# Altium PCB stm32_board.PcbDoc
Units mm, origin at the board's own origin, x right, y up, seen from the top; angles counter-clockwise.
Board outline 49 x 27 mm, 4 copper layers (Top Layer, Int1 (GND), Int2 (PWR), Bottom Layer), stack 2.365 mm thick; 44 components, 31 nets, 184 pads, 58 vias.
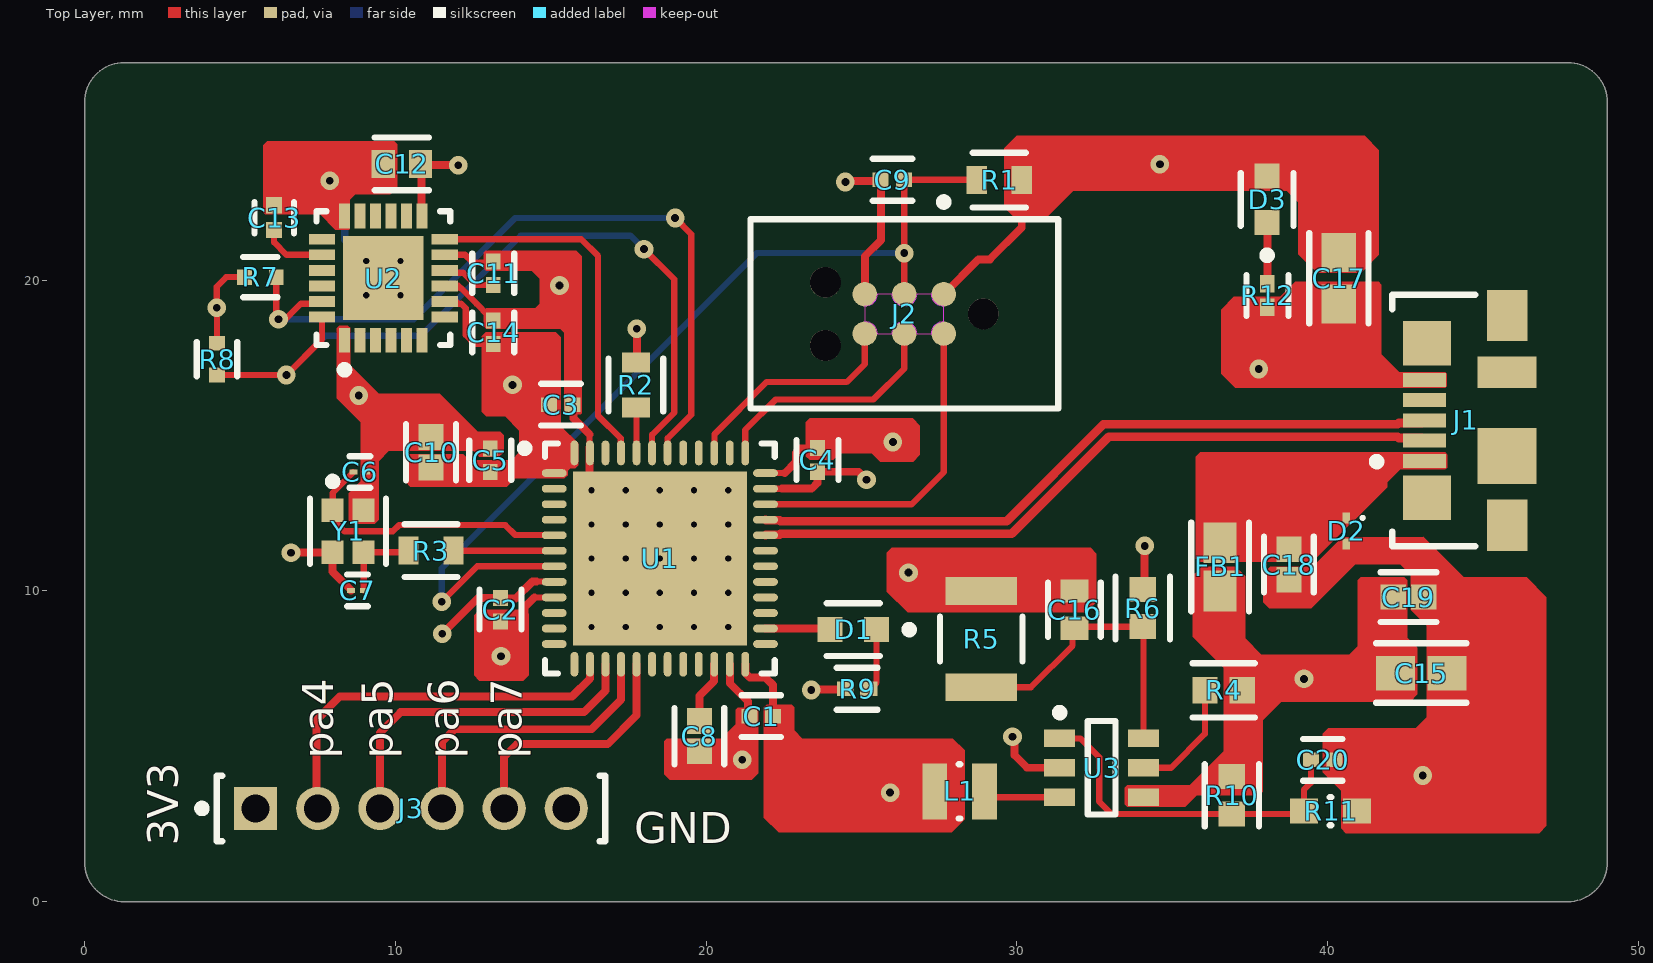
[diagram p0: Top Layer view]
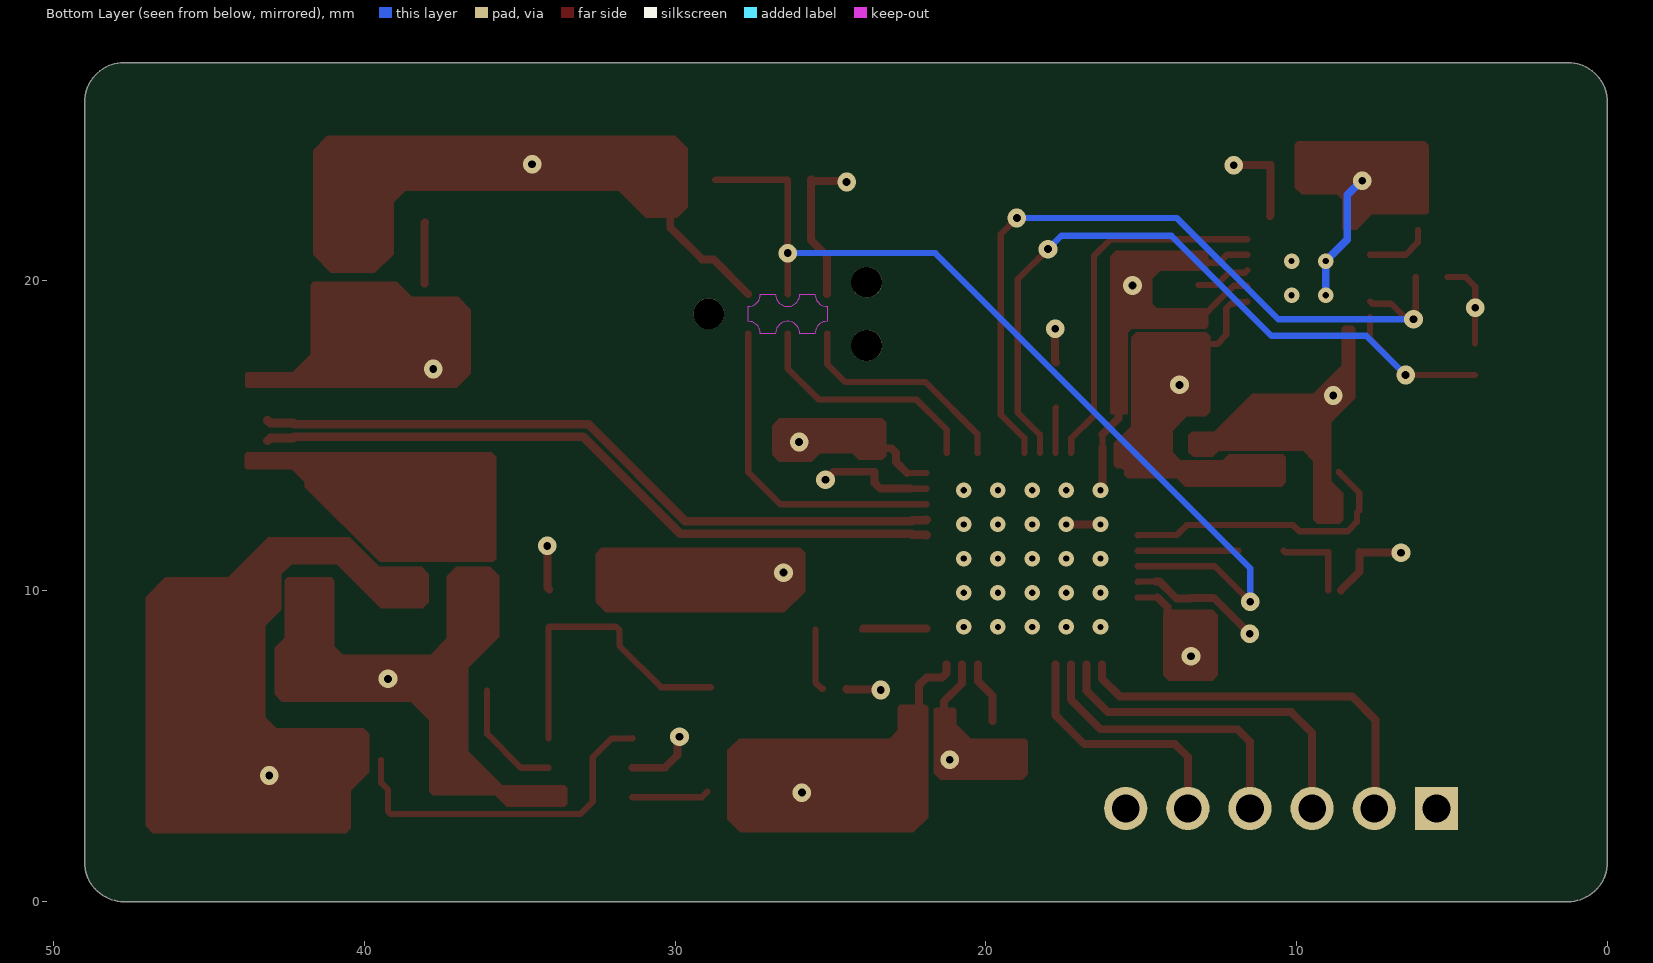
[diagram p1: Bottom Layer view, seen from below]
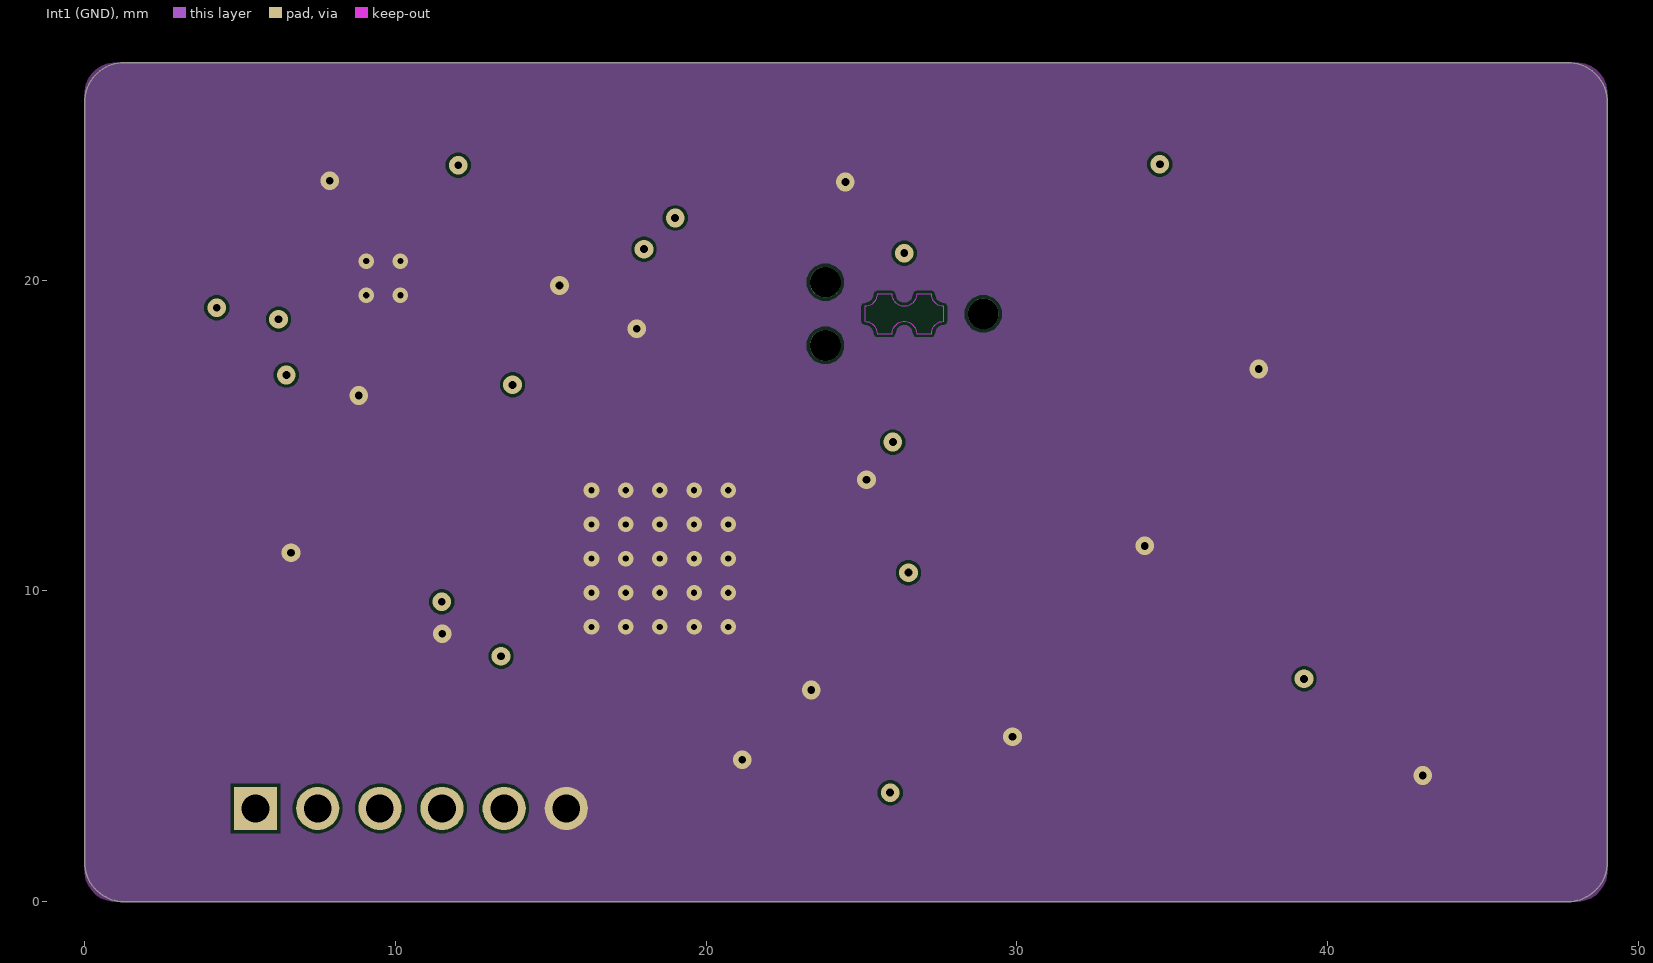
[diagram p2: Int1 (GND)]
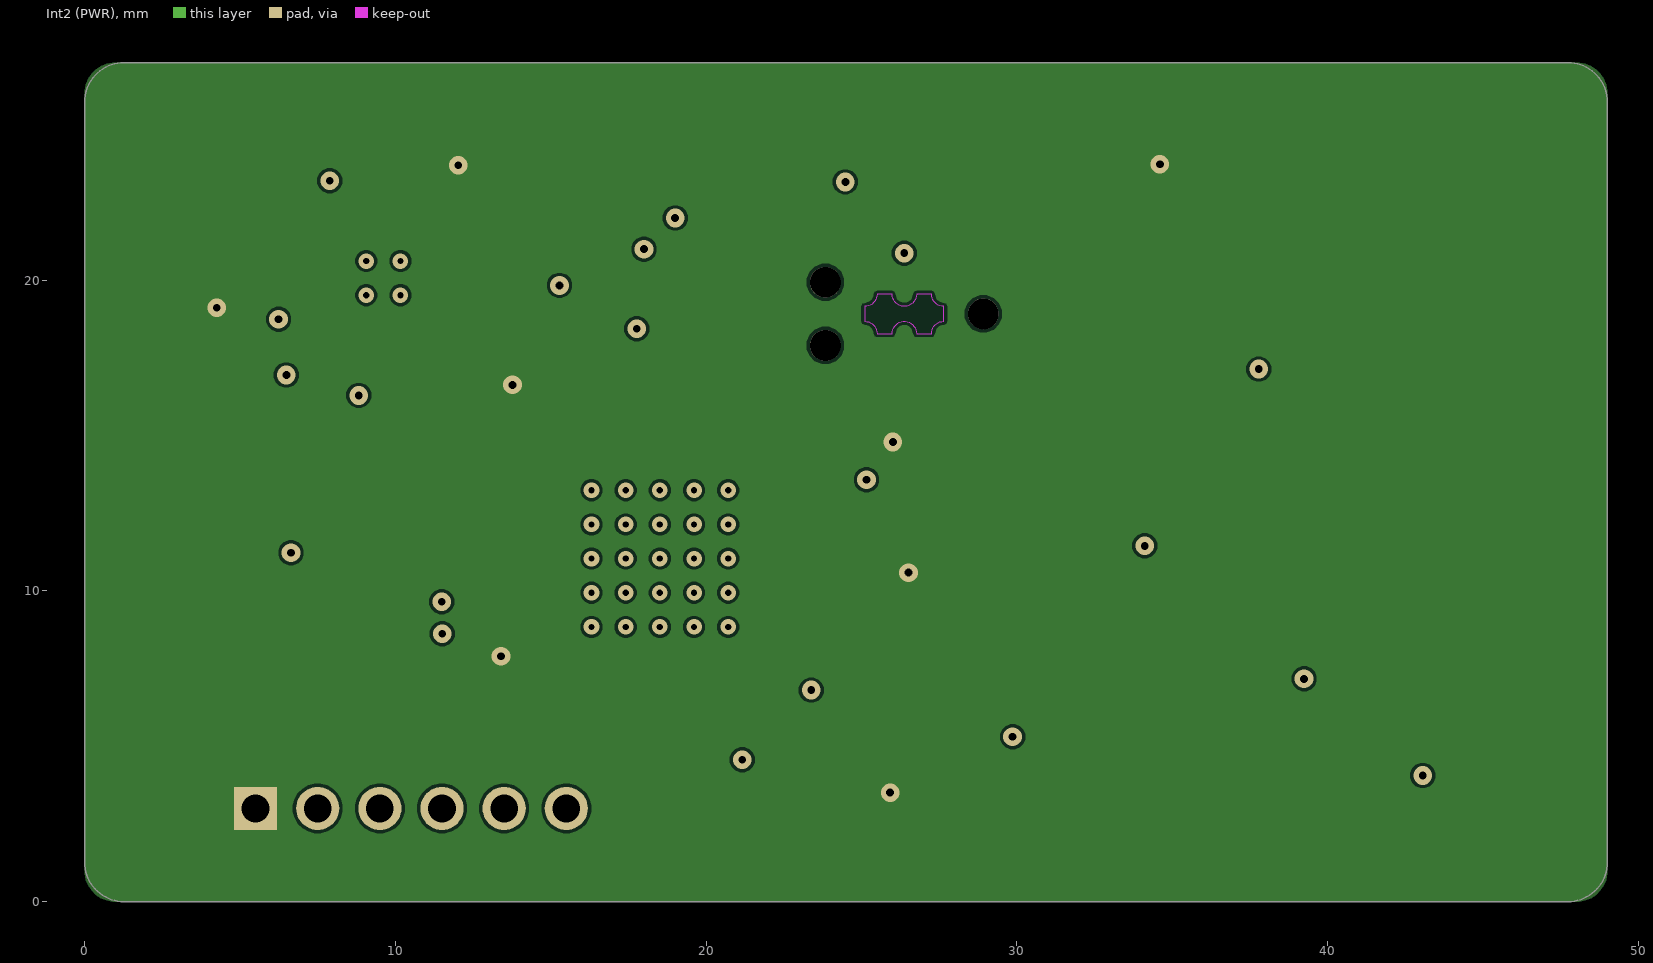
[diagram p3: Int2 (PWR)]
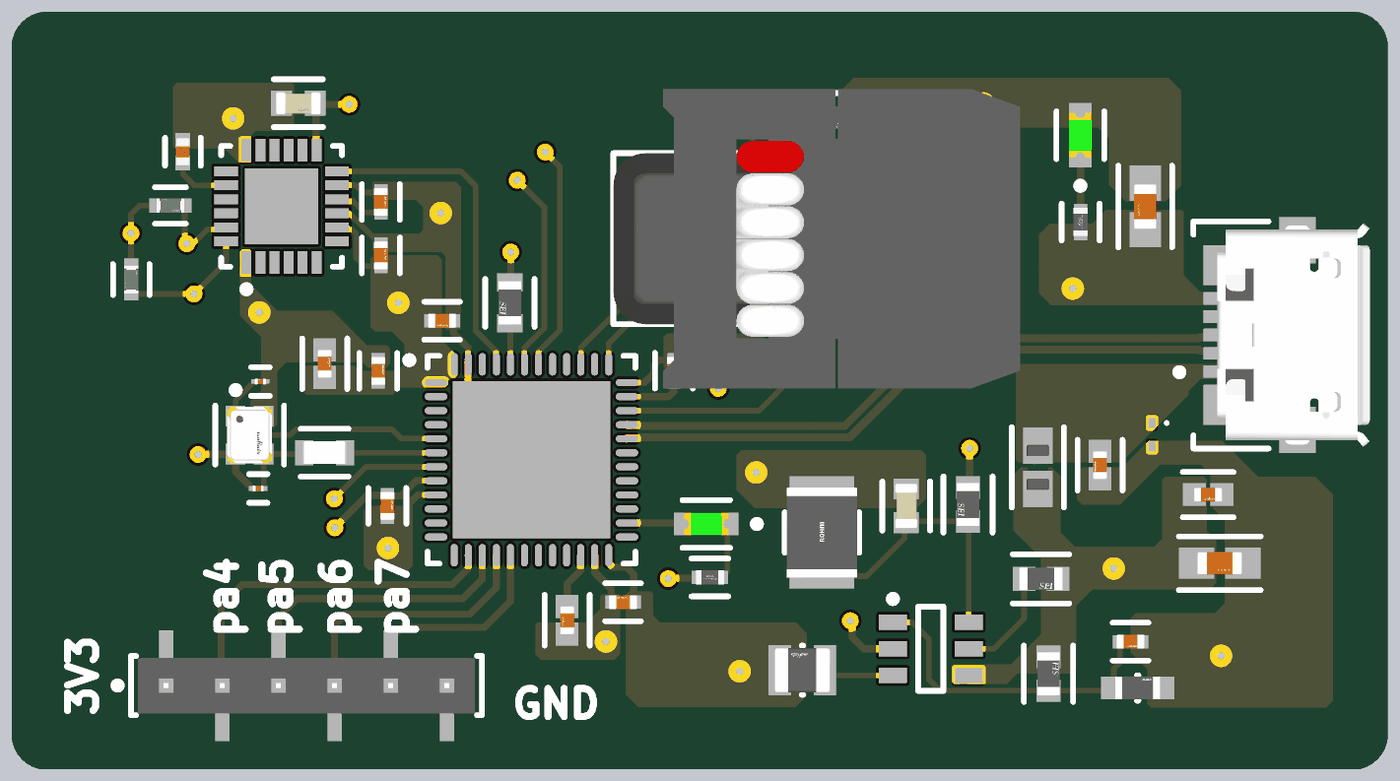
[diagram p4: 3D render of the assembled board from above, using the file's embedded part models]

## Layer stack, top to bottom
Top Solder: solder mask 0.0254, SM-001, Dk 4
Top Layer: signal copper 0.035
Dielectric 1: prepreg 0.24, PP-017, Dk 4.6
Dielectric 2: prepreg 0.24, PP-017, Dk 4.6
Int1 (GND): signal copper 0.035
Dielectric 3: core 1.265, Core-039, Dk 4.6
Int2 (PWR): signal copper 0.035
Dielectric 4: prepreg 0.24, PP-017, Dk 4.6
Dielectric 5: prepreg 0.24, PP-017, Dk 4.6
Bottom Layer: signal copper 0.035
Bottom Solder: solder mask 0.0254, SM-001, Dk 4

## Board outline
1.27,0 cw(c1.27,1.27) 0,1.27 0,25.73 cw(c1.27,25.73) 1.27,27 47.73,27 cw(c47.73,25.73) 49,25.73 49,1.27 cw(c47.73,1.27) 47.73,0

## Design rules (kind name [scope] priority, off if disabled: settings)
AcuteAngle [All] p1: minimum=6.00000000000000E+0001 checktracksonly=FALSE
Clearance [All] p1: gap=0.1 ignorepadtopadclearanceinfootprint=FALSE except(0.2: Arc-THPad Arc-Via Track-THPad Track-Via)
DiffPairsRouting [All] p1: maxlimit=0.127 minlimit=0.127 mostfreqgap=0.127 toplayer_minwidth=0.28 toplayer_maxwidth=0.28 toplayer_prefwidth=0.28 bottomlayer_minwidth=0.28 bottomlayer_maxwidth=0.28 bottomlayer_prefwidth=0.28 impedanceprofiledriven=TRUE impedanceprofileid={46C85864-5B5E-46E6-8006-2A87E43765AD} impedanceprofilevalue=90.000000 maxuncoupledlength=12.7
MinimumAnnularRing [All] p1: minimumring=0.2
ParallelSegment [All] p1: limit=254 gap=0.16
PolygonConnect [All] p1: connectstyle=Direct reliefconductorwidth=0.254 reliefentries=4 polygonreliefangle="90 Angle" airgapwidth=0.254
RoutingVias [All] p1: holewidth=0.3 width=0.7 viastyle="Through Hole" minholewidth=0.25 minwidth=0.55 maxholewidth=0.4 maxwidth=1
SolderMaskExpansion [All] p1: expansion=0.102 istentingtop=FALSE
SupplyNets "Schematic Supply Nets_3" [InNet('3.3V')] p1: voltage=0.000
SupplyNets "Schematic Supply Nets_2" [InNet('GND')] p2: voltage=0.000
SupplyNets "Schematic Supply Nets_1" [InNet('VBUS')] p3: voltage=0.000
SupplyNets "Schematic Supply Nets" [InNet('5V')] p4: voltage=0.000
UnRoutedNet [All] p1: checkbadconnections=TRUE
Width [All] p1: maxlimit=0.254 minlimit=0.16 preferedwidth=0.2
28 further rules are at their usual default settings.

## Classes and differential pairs
differential pair USB_D: +USB_D_P -USB_D_N

## Components (designator, comment, footprint, x,y, rotation, side; value= is the part's Value field where it differs from the comment)
C1 "CL05B104KP5NNNC" FP-CL17-IPC_C 21.77,5.97 r180 top
C2 "CL05B104KP5NNNC" FP-CL17-IPC_C 13.38,9.4 r90 top
C3 "CL05B104KP5NNNC" FP-CL17-IPC_C 15.327,15.994 r0 top
C4 "CL05B104KP5NNNC" FP-CL17-IPC_C 23.582,14.214 r270 top
C5 "CL05B104KP5NNNC" FP-CL17-IPC_C 13.053,14.208 r90 top
C6 "GRM0225C1C100JA03L" FP-GRM022-0_02-IPC_C 8.858,13.827 r180 top
C7 "GRM0225C1C100JA03L" FP-GRM022-0_02-IPC_C 8.78,10.02 r0 top
C8 "GRM155D71A225ME15D" FP-GRM155-0_2-0_05-IPC_A 19.78,5.326 r270 top
C9 "CL05B104KP5NNNC" FP-CL17-IPC_C 25.995,23.233 r180 top
C10 "GRM155D71A225ME15D" FP-GRM155-0_2-0_05-IPC_A 11.148,14.462 r90 top
C11 "CL05B104KP5NNNC" FP-CL17-IPC_C 13.148,20.225 r90 top
C12 "C0603C103K5RACTU" FP-C0603C-CF-MFG 10.21,23.74 r180 top value="10,000 pF"
C13 "C0402C222F4GACTU" FP-C0402-BB-MFG 6.098,22.013 r90 top value=2n2
C14 "CL05B104KP5NNNC" FP-CL17-IPC_C 13.148,18.32 r90 top
C15 "LMK107BBJ106MALT" FP-0603-L_1_6_0_2-W_0_8_0-IPC_A 43.013,7.358 r0 top
C16 "C0603C220J5GACTU" FP-C0603C-CF-MFG 31.85,9.4 r270 top value="22 pF"
C17 "LMK107BBJ106MALT" FP-0603-L_1_6_0_2-W_0_8_0-IPC_A 40.36,20.06 r270 top
C18 "GRM155D71A225ME15D" FP-GRM155-0_2-0_05-IPC_A 38.75,10.85 r270 top
C19 "GRM155D71A225ME15D" FP-GRM155-0_2-0_05-IPC_A 42.6,9.8 r0 top
C20 "CL05B104KP5NNNC" FP-CL17-IPC_C 39.838,4.564 r0 top
D1 "LTST-C190GKT" FP-LTST-C190GKT-MFG 24.733,8.755 r180 top
D2 "ESD9X5.0ST5G" ONSC-SOD-923-2-514AA-01_V 40.6,11.93 r270 top
D3 "LTST-C190GKT" FP-LTST-C190GKT-MFG 38.05,22.6 r90 top
FB1 "BLM18KG121TN1D" FP-BLM18-0_15-t0_6-d1_2-IPC_A 36.536,10.773 r270 top
J1 "473460001" FP-473460001-MFG 45.426,15.486 r90 top
J2 "TC2030-CTX-NL" FP-TC2030-CTX-NL-MFG 26.376,18.915 r180 top
J3 "TMM-106-01-T-S" FP-TMM-106-01-T-S-MFG 10.5,3 r0 top
L1 "LQM2MPN2R2NG0L" FP-LQM2MPN_G0-MFG 28.154,3.548 r180 top
R1 "RMCF0603FT10K0" FP-RMCF0603-MFG 29.43,23.22 r0 top
R2 "RMCF0603FT10K0" FP-RMCF0603-MFG 17.74,16.629 r270 top
R3 "RMCF0603ZT0R00" FP-RMCF0603-MFG 11.144,11.295 r0 top value=0mΩ
R4 "RMCF0603FT100K" FP-RMCF0603-IPC_C 36.65,6.8 r0 top
R5 "KTR25JZPF4303" FP-KTR25-MFG 28.85,8.45 r90 top
R6 "RMCF0603FT100K" FP-RMCF0603-IPC_C 34.05,9.45 r270 top
R7 "ERA-2AEB222X" FP-ERA2A-MFG 5.655,20.098 r180 top value=2.2kΩ
R8 "ERA-2AEB222X" FP-ERA2A-MFG 4.26,17.46 r90 top value=2.2kΩ
R9 "CRGCQ0402J220R" FP-CRGCQ0402-IPC_C 24.86,6.85 r0 top value=220Ω
R10 "RMCF0603FT100K" FP-RMCF0603-IPC_C 36.917,3.421 r90 top
R11 "RC0603FR-0747KL" FP-RC0603FR-0747KL-MFG 40.092,2.913 r0 top
R12 "CRGCQ0402J220R" FP-CRGCQ0402-IPC_C 38.06,19.508 r90 top value=220Ω
U1 "STM32F411CEU6" STM-UFQFPN48_L 18.51,11.041 r0 top
U2 "MPU-6050" IS-QFN-24_V 9.612,20.066 r90 top
U3 "AP3401" AP3401 32.726,4.31 r0 top
Y1 "XRCGB24M000F3M00R0" FP-XRCGB_F_N-MFG 8.477,11.922 r270 top

## Footprints (in the part's own frame and the unit in brackets; to place one, negate y for a bottom-side part, rotate by r counter-clockwise, add the part's x,y. Pads: shape width x height; smd on the part's side, far side on the other; paste and mask are expansions set on the pad)
AP3401 [mm] "1.5MHZ, 1A STEP-DOWN DC - DC BUCK CONVERTER"
  rect 1x0.55 smd: EN(-1.35,0.95) FB(1.35,0.95) GND(-1.35,0) LX(-1.35,-0.95) PG(1.35,0) VIN(1.35,-0.95)
  silkscreen extent -1.47,-1.5 0.45,1.9, body extent -0.85,-1.5 0.85,1.5, height 1.1
FP-0603-L_1_6_0_2-W_0_8_0-IPC_A [mm]
  rect 1.258x1.112 smd paste+0 mask+0: 1(-0.827,0) 2(0.827,0)
  silkscreen extent -1.46,-0.96 1.46,0.96, body extent -1.96,-1.06 1.96,1.06, height 0.25
FP-473460001-MFG [mm]
  rect 0.45x1.38 smd paste+0 mask+0: 1(-1.3,2.31) 2(-0.65,2.31) 3(0,2.31) 4(0.65,2.31) 5(1.3,2.31)
  rect 1.425x1.55 smd paste+0 mask+0: 6(-2.488,2.225) 7(2.488,2.225)
  rect 1.65x1.3 smd paste+0 mask+0: 8(-3.375,-0.35) 11(3.375,-0.35)
  rect 1.8x1.9 smd paste+0 mask+0: 9(-1.15,-0.35)
  rect 1x1.9 smd paste+0 mask+0: 10(1.55,-0.35)
  silkscreen extent -4.05,0.67 4.05,3.97, body extent -4.3,-2.48 4.3,3.45, height 0.25
FP-BLM18-0_15-t0_6-d1_2-IPC_A [mm]
  rect 1.306x1.058 smd paste+0 mask+0: 1(-0.776,0) 2(0.776,0)
  silkscreen extent -1.43,-0.93 1.43,0.93, body extent -1.93,-1.03 1.93,1.03, height 0.25
FP-C0402-BB-MFG [mm]
  rect 0.52x0.52 smd paste+0 mask+0: 1(-0.4,0) 2(0.4,0)
  silkscreen extent -0.5,-0.64 0.5,0.64, body extent -0.8,-0.4 0.8,0.4, height 0.25
FP-C0603C-CF-MFG [mm]
  rect 0.75x0.9 smd paste+0 mask+0: 1(-0.6,0) 2(0.6,0)
  silkscreen extent -0.87,-0.85 0.88,0.85, body extent -1.2,-0.6 1.2,0.6, height 0.25
FP-CL17-IPC_C [mm]
  rect 0.515x0.472 smd paste+0 mask+0: 1(-0.379,0) 2(0.379,0)
  silkscreen extent -0.64,-0.67 0.64,0.67, body extent -0.74,-0.38 0.74,0.38, height 0.25
FP-CRGCQ0402-IPC_C [mm]
  rect 0.56x0.472 smd paste+0 mask+0: 1(-0.376,0) 2(0.376,0)
  silkscreen extent -0.66,-0.67 0.66,0.67, body extent -0.76,-0.38 0.76,0.38, height 0.25
FP-ERA2A-MFG [mm]
  rect 0.475x0.5 smd paste+0 mask+0: 1(-0.512,0) 2(0.512,0)
  silkscreen extent -0.55,-0.65 0.55,0.65, body extent -0.85,-0.4 0.85,0.4, height 0.25
FP-GRM022-0_02-IPC_C [mm]
  rect 0.256x0.161 smd paste+0 mask+0: 1(-0.203,0) 2(0.203,0)
  silkscreen extent -0.33,-0.51 0.33,0.51, body extent -0.43,-0.21 0.43,0.21, height 0.25
FP-GRM155-0_2-0_05-IPC_A [mm]
  rect 0.828x0.806 smd paste+0 mask+0: 1(-0.489,0) 2(0.489,0)
  silkscreen extent -0.9,-0.8 0.9,0.8, body extent -1.1,-0.6 1.1,0.6, height 0.25
FP-KTR25-MFG [mm]
  rect 0.9x2.3 smd paste+0 mask+0: 1(-1.55,0) 2(1.55,0)
  silkscreen extent -0.72,-1.33 0.72,1.33, body extent -2.1,-1.43 2.1,1.43, height 0.25
FP-LQM2MPN_G0-MFG [mm]
  rect 0.8x1.8 smd paste+0 mask+0: 1(-0.8,0) 2(0.8,0)
  silkscreen extent -0.03,-0.87 0.03,0.87, body extent -1.3,-1 1.3,1, height 0.25
FP-LTST-C190GKT-MFG [mm]
  rect 0.8x0.8 smd paste+0 mask+0: 1(-0.75,0) 2(0.75,0)
  silkscreen extent -1.92,-0.85 0.85,0.85, body extent -1.25,-0.55 1.25,0.55, height 0.25
FP-RC0603FR-0747KL-MFG [mm]
  rect 0.9x0.8 smd paste+0 mask+0: 1(-0.85,0) 2(0.85,0)
  silkscreen extent -0.03,-0.45 0.03,0.45, body extent -1.4,-0.55 1.4,0.55, height 0.25
FP-RMCF0603-IPC_C [mm]
  rect 0.806x0.858 smd paste+0 mask+0: 1(-0.601,0) 2(0.601,0)
  silkscreen extent -1,-0.87 1,0.87, body extent -1.1,-0.58 1.1,0.58, height 0.25
FP-RMCF0603-MFG [mm]
  rect 0.65x0.9 smd paste+0 mask+0: 1(-0.725,0) 2(0.725,0)
  silkscreen extent -0.85,-0.88 0.85,0.88, body extent -1.15,-0.58 1.15,0.58, height 0.25
FP-TC2030-CTX-NL-MFG [mil]
  round 30.98 smd paste-39370.1 mask+0: 1(-50,-25) 2(-50,25) 3(0,-25) 4(0,25) 5(50,-25) 6(50,25)
  round 39.02 hole 39.02 unplated paste-99999 mask+0: ""(-100,0) ""(100,-40) ""(100,40)
  Keep-Out Layer region: -34.51,-25 -15.49,-25 -13.96,-18.28 -9.66,-12.89 -3.45,-9.9 3.45,-9.9 9.66,-12.89 13.96,-18.28 15.49,-25 15.49,-25 34.51,-25 35.69,-19.07 39.05,-14.05 44.07,-10.69 50,-9.51 50,-9.51 50,9.51 44.07,10.69 39.05,14.05 35.69,19.07 34.51,25 34.51,25 15.49,25 13.96,18.28 9.66,12.89 3.45,9.9 -3.45,9.9 -9.66,12.89 -13.96,18.28 -15.49,25 -15.49,25 -34.51,25 -35.69,19.07 -39.05,14.05 -44.07,10.69 -50,9.51 -50,9.51 -50,-9.51 -44.07,-10.69 -39.05,-14.05 -35.69,-19.07 -34.51,-25
  silkscreen extent -195,-147 195,120, body extent -199,-124 199,124, height 10
FP-TMM-106-01-T-S-MFG [mm]
  rect 1.39x1.39 hole 0.89 paste-2539.97 mask+0: 1(-5,0)
  round 1.39 hole 0.89 paste-2539.97 mask+0: 2(-3,0) 3(-1,0) 4(1,0) 5(3,0) 6(5,0)
  silkscreen extent -6.85,-1.05 6.25,1.05, body extent -6.1,-2.07 6.1,2.07, height 0.25
FP-XRCGB_F_N-MFG [mm]
  rect 0.75x0.7 smd paste+0 mask+0: 1(-0.675,-0.5) 2(0.675,-0.5) 3(0.675,0.5) 4(-0.675,0.5)
  silkscreen extent -1.72,-1.22 1.05,1.22, body extent -1.15,-0.95 1.15,0.95, height 0.25
IS-QFN-24_V [mm] "QFN, 24-Leads, Body 4x4mm, Pitch 0.5mm, Thermal Pad 2.7x2.6mm"
  rect 0.8x0.35 smd: 1(-2,1.25) 2(-2,0.75) 3(-2,0.25) 4(-2,-0.25) 5(-2,-0.75) 6(-2,-1.25) 13(2,-1.25) 14(2,-0.75) 15(2,-0.25) 16(2,0.25) 17(2,0.75) 18(2,1.25)
  rect 0.35x0.85 smd mask+0.102: 7(-1.25,-1.975) 8(-0.75,-1.975) 9(-0.25,-1.975) 10(0.25,-1.975) 11(0.75,-1.975) 12(1.25,-1.975) 19(1.25,1.975) 20(0.75,1.975) 21(0.25,1.975) 22(-0.25,1.975) 23(-0.75,1.975) 24(-1.25,1.975)
  rect 2.7x2.6 smd: 25(0,0)
  silkscreen extent -3.07,-2.15 2.15,2.15, body extent -2,-2 2,2, height 0.95
ONSC-SOD-923-2-514AA-01_V [mm] "SOD, 2-Leads, Body 0.8x0.6mm"
  rect 0.36x0.25 smd: 1(-0.42,0) 2(0.42,0)
  silkscreen extent -0.47,0.48 -0.37,0.58, body extent -0.4,-0.3 0.4,0.3, height 0.43
STM-UFQFPN48_L [mm] "QFN, 48-Leads, Body 7.1x7.1mm, Pitch 0.5mm, Thermal Pad 5.6x5.6mm, IPC High Density"
  oval 0.8x0.25 smd: 1(-3.4,2.75) 2(-3.4,2.25) 3(-3.4,1.75) 4(-3.4,1.25) 5(-3.4,0.75) 6(-3.4,0.25) 7(-3.4,-0.25) 8(-3.4,-0.75) 9(-3.4,-1.25) 10(-3.4,-1.75) 11(-3.4,-2.25) 12(-3.4,-2.75) 25(3.4,-2.75) 26(3.4,-2.25) 27(3.4,-1.75) 28(3.4,-1.25) 29(3.4,-0.75) 30(3.4,-0.25) 31(3.4,0.25) 32(3.4,0.75) 33(3.4,1.25) 34(3.4,1.75) 35(3.4,2.25) 36(3.4,2.75)
  oval 0.25x0.8 smd: 13(-2.75,-3.4) 14(-2.25,-3.4) 15(-1.75,-3.4) 16(-1.25,-3.4) 17(-0.75,-3.4) 18(-0.25,-3.4) 19(0.25,-3.4) 20(0.75,-3.4) 21(1.25,-3.4) 22(1.75,-3.4) 23(2.25,-3.4) 24(2.75,-3.4) 37(2.75,3.4) 38(2.25,3.4) 39(1.75,3.4) 40(1.25,3.4) 41(0.75,3.4) 42(0.25,3.4) 43(-0.25,3.4) 44(-0.75,3.4) 45(-1.25,3.4) 46(-1.75,3.4) 47(-2.25,3.4) 48(-2.75,3.4)
  rect 5.6x5.6 smd: 49(0,0)
  silkscreen extent -4.47,-3.7 3.7,3.7, body extent -3.55,-3.55 3.55,3.55, height 0.6

## Part data
C1 C2 C3 C4 C5 C9 C11 C14 C20: library part CMP-13271-001069-1, "Cap Ceramic 100nF 10V X7R ±10% SMD 0402 +125°C Paper T/R", Capacitance=100nF, Case Code (Imperial)=0402, Case Code (Metric)=1005, Dielectric=X7R, Max Operating Temperature=125°C, Min Operating Temperature=-55°C, Package Quantity=1, Tolerance=10%, Voltage Rating=10V, Case/Package=0402, Contact Plating=Tin, Depth=0.5mm, Height=0.5mm, Length=1mm, Mount="Surface Mount", Packaging="Tape and Reel", Radiation Hardening=No, Thickness=0.022inch, Width=0.02inch
C6 C7: library part CMP-06035-032745-1, "Chip Multilayer Ceramic Capacitors for General Purpose, 01005, 10pF, C0G, 30ppm/°C, 5%, 16V", Capacitance=10pF, Case Code (Imperial)=1005, Case Code (Metric)=0402, Dielectric=C0G, Max Operating Temperature=125°C, Min Operating Temperature=-55°C, Tolerance=5%, Voltage Rating=16V, Length=0.016inch, Mount="Surface Mount", Packaging="Cut Tape", Thickness=0.009inch, Voltage Rating (DC)=16V, Width=0.008inch
C8 C10 C18 C19: library part CMP-06035-053899-1, "Chip Multilayer Ceramic Capacitors for General Purpose, 0402, 2.2uF, X7T, +22%/-33%, 20%, 10V", Capacitance=2.2uF, Case Code (Imperial)=0402, Case Code (Metric)=1005, Dielectric=X7T, Max Operating Temperature=125°C, Min Operating Temperature=-55°C, Package Quantity=10000, Tolerance=20%, Voltage Rating=10V, Case/Package=0402, Height=0.5mm, Length=0.039inch, Mount="Surface Mount", Packaging="Tape and Reel", Termination=SMD/SMT, Thickness=0.022inch, Voltage Rating (DC)=10V, Weight=0.000212oz, Width=0.02inch
C12: library part CMP-2006-03046-3, "CAP CER 10000PF 50V X7R 0603", Capacitance="10 nF", Manufacturer=KEMET, Package=C0603C-CF, Temperature="-55°C to +125°C", Temperature Characteristic=X7R, Temperature Coefficient=30ppm/°C, Temperature Range High=+125°C, Temperature Range Low=-55°C, Tolerance=0.1, Voltage Rating="50 V", Automotive=Yes, Automotive Grade="Grade 1", Category=Cap, ComponentLink2Description=Datasheet, ComponentLink2URL=https://api.kemet.com/component-edge/download/datasheet/C0603C100J5GACAUTO.pdf, Device Class L1="Passive Components", Device Class L2=Capacitors, Device Class L3="Ceramic Capacitors", Digikey Description="CAP CER 10000PF 50V X7R 0603", Height=0.87mm, Lead Free=Yes, Manufacturer Part Number=C0603C103K5RACTU, Material=Ceramic, Mouser Description="Ceramic Capacitor 0.01Uf, 50V, X7R, 10%, 0603, Full Reel", Octopart=https://octopart.com/c0603c103k5ractu-kemet-133094, RoHS=TRUE
C13: library part CMP-1034-01730-4, "CAP CER 2200PF 16V NP0 0402", Capacitance="2,200 pF", Manufacturer=Kemet, Package=C0402-BB, Temperature="-55°C to +125°C", Temperature Characteristic=C0G, Temperature Coefficient=15%, Temperature Range High=+125°C, Temperature Range Low=-55°C, Tolerance=0.01, Voltage Rating="16 V", Automotive=No, Category=Cap, ComponentLink2Description=Datasheet, ComponentLink2URL=https://content.kemet.com/datasheets/KEM_C1002_X7R_SMD.pdf, Device Class L1="Passive Components", Device Class L2=Capacitors, Device Class L3="Ceramic Capacitors", Digikey Description="CAP CER 2200PF 16V NP0 0402", Height=0.55mm, Ipc Land Pattern Name=CAPC10050X50, Lead Free=Yes, Manufacturer Part Number=C0402C222F4GACTU, Material=Ceramic, Mouser Description="Cap Ceramic 0.0022uF 16V C0G 1% SMD 0402 125°C Punched Paper T/R", Octopart=https://octopart.com/c0402c222f4gactu-kemet-12823119, RoHS=TRUE
C15 C17: library part CMP-14477-000150-3, "Multilayer Ceramic Capacitor 10uF 10V X5R 20% SMD 0603 T/R", Capacitance=10uF, Case Code (Imperial)=0603, Case Code (Metric)=1608, Dielectric=X5R, Max Operating Temperature=85°C, Min Operating Temperature=-55°C, Package Quantity=1, Resistor Type=Ceramic, Tolerance=20%, Voltage=10V, Case/Package=0603, Construction=Flat, Depth=0.8mm, Height=0.8mm, Lead Free="Lead Free", Length=1.6mm, Mount="Surface Mount", Packaging="Tape and Reel", Radiation Hardening=No, RoHS Compliant=Yes, Series=M, Termination=SMD/SMT, Thickness=0.035inch, Voltage Rating=10V, Voltage Rating (DC)=10V, Width=0.8mm
C16: library part CMP-2006-03119-3, "Cap Ceramic 22pF 50V C0G 5% SMD 0603 125°C Paper T/R", Capacitance="22 pF", Manufacturer=KEMET, Package=C0603C-CF, Temperature="-55°C to +125°C", Temperature Characteristic=C0G, Temperature Coefficient=30ppm/°C, Temperature Range High=+125°C, Temperature Range Low=-55°C, Tolerance=0.05, Voltage Rating="50 V", Automotive=Yes, Automotive Grade="Grade 1", Category=Cap, ComponentLink2Description=Datasheet, ComponentLink2URL=https://api.kemet.com/component-edge/download/datasheet/C0603C100J5GACAUTO.pdf, Device Class L1="Passive Components", Device Class L2=Capacitors, Device Class L3="Ceramic Capacitors", Digikey Description="Cap Ceramic 22pF 50V C0G 5% SMD 0603 125°C Paper T/R", Height=0.87mm, Lead Free=Yes, Manufacturer Part Number=C0603C220J5GACTU, Material=Ceramic, Mouser Description="Cap Ceramic 22pF 50V C0G 5% SMD 0603 125°C Paper T/R", Octopart=https://octopart.com/c0603c220j5gactu-kemet-98525, RoHS=TRUE
D1 D3: library part CMP-22017-000005-2, "LED GREEN CLEAR CHIP SMD", Case Code (Imperial)=0603, Case Code (Metric)=1608, Color=Green, Forward Current=30mA, Forward Voltage=2.1V, Lens Color=Colorless, Max Operating Temperature=85°C, Min Operating Temperature=-55°C, Package Quantity=1, Power Dissipation=100mW, Reverse Voltage=5V, Test Current=10mA, Voltage=2V, Case/Package=0603, Depth=0.8mm, Dominant Wavelength=569nm, Height=0.8mm, Illumination Color=Green, Lead Free="Lead Free", Length=1.6mm, Lens Style=Clear, Lens Transparency=Clear, Luminous Intensity=6mcd, Mount="Surface Mount", Number of Elements=1, Number of LEDs=1, Number of Pins=2, Packaging="Tape and Reel", Power Rating=100mW, Radiation Hardening=No, Viewing Angle=130°, Wavelength=565nm, Width=0.8mm
D2: library part CMP-1063-00108-1, "Transient Voltage Suppressor, Micro-Packaged Diode for ESD Protection, 2-Pin SOD-923, Pb-Free, Tape and Reel", Manufacturer="On Semiconductor", ComponentLink1Description="Manufacturer URL", ComponentLink1URL=http://www.onsemi.com/, ComponentLink2Description=Datasheet, ComponentLink2URL=http://www.onsemi.cn/pub_link/Collateral/ESD9X3.3ST5G-D.PDF, ComponentLink3Description="Package Specification", ComponentLink3URL=http://www.onsemi.com/pub_link/Collateral/514AA.PDF, DatasheetVersion="Rev. 7", Direction=Unidirectional, IR Max (uA)=1, Mounting Technology="Surface Mount", Number of Lines=1, PackageDescription="2-Pin SOD, Body 0.8 x 0.6 mm", PackageReference=SOD-923-2-514AA-01, PackageVersion="Rev. E, 03/2011", Packing="Tape and Reel", PartNumber=ESD9X5.0ST5G, RoHS=Pb-Free, V(BR) Min (V)=6.2, VRWM Max (V)=5
FB1: library part CMP-0686-00554-8, "FERRITE BEAD 120 OHM 0603 1LN", Case Code (Imperial)=0603, Case Code (Metric)=1608, Current Rating=3A, DC Resistance (DCR)=30mR, Inductor Type="FERRITE BEAD", Max Operating Temperature=125°C, Min Operating Temperature=-55°C, Package Quantity=4000, Test Frequency=100MHz, Tolerance=25%, Case/Package=0603, Core Material=Ferrite, Depth=0.95mm, Height=0.8mm, Impedance=120R, Lead Free="Lead Free", Length=1.6mm, Material=Ferrite, Max Current Rating=3A, Max DC Current=3A, Number of Circuits=1, Number of Lines=1, Number of Pins=2, Packaging="Tape and Reel", REACH SVHC="No SVHC", RoHS Compliant=Yes, Series=BLM18K, Termination=SMD/SMT, Width=0.8mm
J1: library part CMP-2000-05246-2, "CONN RCPT USB2.0 MICRO B SMD R/A", Current Rating=1.8A, Manufacturer=Molex, Package=0, Temperature="-30°C to +85°C", Temperature Range High=+85°C, Temperature Range Low=-30°C, Voltage Rating=30V, Automotive=No, Category=Conn, ComponentLink2Description=Datasheet, ComponentLink2URL=https://www.molex.com/webdocs/datasheets/pdf/en-us/0473460001_IO_CONNECTORS.pdf, Conn Orientation="Right Angle", Contact Material=Gold,Nickel, Device Class L1=Connectors, Device Class L2="USB Connectors", Device Class L3=unset, Digikey Description="CONN RCPT USB2.0 MICRO B SMD R/A", Footprint Url=https://www.molex.com/pdm_docs/sd/473460001_sd.pdf, Height=2.945mm, Is Female=yes, Lead Free=Yes, Manufacturer Part Number=473460001, Number Of Contacts=5, Octopart=https://octopart.com/47346-0001-molex-7164928, Pitch=0.65mm, RoHS=TRUE, Shielding=true, Usb Standard="USB 2.0"
J2: library part CMP-205963-000001-1, "6-Pin “No legs” TC2030 Plug-of-Nails™ Cable for use with ARM Cortex processors"
J3: library part CMP-02766-001694-1, "CONN HEADER VERT 6POS 2MM", Color=Black, Max Operating Temperature=105°C, Max Voltage Rating (AC)=500V, Min Operating Temperature=-55°C, Connector Type="Male Pin", Contact Material=Bronze, Contact Mating Length=0.126inch, Contact Plating=Tin, Contact Type="Male Pin", Depth=1.97mm, Gender=Male, Housing Color=Black, Housing Material=Polymer, Lead Free="Lead Free", Length=12mm, Mount="Through Hole", Number Of Contacts=6, Number of Positions=6, Number of Rows=1, Orientation=Straight, Packaging=Bulk, Pitch=2mm, Radiation Hardening=No, REACH SVHC="No SVHC", RoHS Compliant=Yes, Series="FleXYZ™ TMM", Termination=Solder, Width=1.97mm
L1: library part CMP-06042-016770-1, "Multilayer Type Inductor for Power Lines, 0806 (2016), 2.2μH, 30%, 0.138Ω, 1.2A", Case Code (Imperial)=0806, Case Code (Metric)=2016, Current Rating=1.2A, DC Resistance (DCR)=138mR, Inductance=2.2uH, Inductance Tolerance=30%, Max Operating Temperature=125°C, Min Operating Temperature=-55°C, Package Quantity=1, Self Resonant Frequency=40MHz, Test Frequency=1MHz, Case/Package=0806, Core Material=Ferrite, DC Current=1.2A, Depth=1.75mm, Height=1mm, Height - Seated (Max)=0.039inch, Lead Free="Lead Free", Length=0.079inch, Max DC Current=1.2A, Military Standard=Not, Mount="Surface Mount", Packaging="Tape and Reel", Radiation Hardening=No, REACH SVHC="No SVHC", RoHS Compliant=Yes, Series=LQM2MPN_G0, Shielding=Shielded, Termination=SMD/SMT, Tolerance=30%, Width=0.063inch
R1 R2: library part CMP-2000-06990-2, "10kΩ ±1% 0.1W 0603 Thick Film Chip Resistor AEC-Q200 compliant", Case Code (Imperial)=0603, Case Code (Metric)=1608, Max Operating Temperature=155°C, Max Power Dissipation=100mW, Min Operating Temperature=-55°C, Resistance=10kR, Resistor Type="Thick Film", Temperature Coefficient=100ppm/°C, Tolerance=1%, Case/Package=0603, Construction=Rectangular, Contact Plating=Tin, Depth=0.8mm, Features="Automotive AEC-Q200", Height=0.022inch, Lead Free="Lead Free", Length=1.55mm, Military Standard=Not, Mount="Surface Mount", Number of Terminations=2, Packaging="Tape and Reel", Power Rating=100mW, Radiation Hardening=No, RoHS Compliant=Yes, Series=RMCF, Size Code=0603, Width=0.031inch
R3: library part CMP-26527-000011-1, "RES 0 OHM JUMPER 1/10W 0603", Manufacturer=Stackpole, Package=RMCF0603, Power Rating=0.1W, Resistance=0mΩ, Temperature="-55°C to +155°C", Temperature Range High=+155°C, Temperature Range Low=-55°C, Voltage Rating=75V, Automotive=Yes, Automotive Grade="Grade 0", Category=Res, ComponentLink2Description=Datasheet, ComponentLink2URL=https://www.seielect.com/catalog/sei-rmcf_rmcp.pdf, Composition="Thick Film", Device Class L1="Passive Components", Device Class L2=Resistors, Device Class L3="Chip SMD Resistors", Digikey Description="RES 0 OHM JUMPER 1/10W 0603", Height=0.55mm, Ipc Land Pattern Name=RESC15580X45, Lead Free=Yes, Manufacturer Part Number=RMCF0603ZT0R00, Octopart=https://octopart.com/rmcf0603zt0r00-stackpole+electronics-19213618, RoHS=TRUE, Series=RMCF
R4 R6 R10: library part CMP-2000-06989-2, "100kΩ ±1% 0.1W 0603 Thick Film Chip Resistor AEC-Q200 compliant", Case Code (Imperial)=0603, Case Code (Metric)=1608, Max Operating Temperature=155°C, Max Power Dissipation=100mW, Min Operating Temperature=-55°C, Resistance=100kR, Resistor Type="Thick Film", Temperature Coefficient=100ppm/°C, Tolerance=1%, Working Voltage=75V, Case/Package=0603, Construction=Rectangular, Contact Plating=Tin, Depth=0.8mm, Features="Automotive AEC-Q200", Height=0.022inch, Lead Free="Lead Free", Length=1.55mm, Military Standard=Not, Mount="Surface Mount", Number of Terminations=2, Packaging="Tape and Reel", Power Rating=100mW, Radiation Hardening=No, RoHS Compliant=Yes, Series=RMCF, Width=0.031inch
R5: library part CMP-08839-003750-1, "Res Thick Film 1210 430kΩ 1% 0.1W ±100ppm/°C Automotive Embossed T/R", Case Code (Imperial)=1210, Case Code (Metric)=3225, Max Operating Temperature=155°C, Max Power Dissipation=333mW, Min Operating Temperature=-55°C, Package Quantity=4000, Resistance=430kR, Resistor Type="Thick Film", Temperature Coefficient=100ppm/°C, Tolerance=1%, Case/Package=1210, Features="Automotive AEC-Q200", Height=0.028inch, Length=0.126inch, Number of Terminations=2, Packaging="Tape and Reel", RoHS Compliant=Yes, Series=KTR, Width=0.098inch
R7 R8: library part CMP-2002-05881-2, "RES SMD 2.2K OHM 0.1% 1/16W 0402", Manufacturer=Panasonic, Package=ERA2A, Power Rating=0.063W, Resistance=2.2kΩ, Temperature="-55°C to +155°C", Temperature Coefficient=25ppm/°C, Temperature Range High=+155°C, Temperature Range Low=-55°C, Tolerance=0.1%, Voltage Rating=50V, Automotive=Yes, Automotive Grade="Grade 0", Category=Res, ComponentLink2Description=Datasheet, ComponentLink2URL=https://industrial.panasonic.com/cdbs/www-data/pdf/RDM0000/AOA0000C307.pdf, Composition="Metal Film", Device Class L1="Passive Components", Device Class L2=Resistors, Device Class L3="Chip SMD Resistors", Digikey Description="RES SMD 2.2K OHM 0.1% 1/16W 0402", Footprint Url=https://b2b-api.panasonic.eu/file_stream/pids/fileversion/1079, Height=0.4mm, Ipc Land Pattern Name=RESC10050X35, Lead Free=Yes, Manufacturer Part Number=ERA-2AEB222X, Mouser Description="Thin Film Resistors - SMD 0402 1/16W 2.2Kohms", Octopart=https://octopart.com/era-2aeb222x-panasonic-9251391, RoHS=TRUE, Series=E24
R9 R12: library part CMP-03211-000793-1, "CRGCQ 0402 220R 5%", Ambient Temperature Range High=+70°C, Manufacturer="TE Connectivity", Package=CRGCQ0402, Power Rating=0.0625W, Resistance=220Ω, Temperature="-55°C to +155°C", Temperature Coefficient=±100ppm/°C, Temperature Range High=+155°C, Temperature Range Low=-55°C, Tolerance=0.05, Voltage Rating=50V, Automotive=Yes, Category=Res, ComponentLink2Description=Datasheet, ComponentLink2URL=https://www.te.com/commerce/DocumentDelivery/DDEController?Action=showdoc&DocId=Data+Sheet%7F1773204-3%7F1%7Fpdf%7FEnglish%7FENG_DS_1773204-3_1.pdf%7F4-2176347-539, Composition="Thick Film", Device Class L1="Passive Components", Device Class L2=Resistors, Device Class L3="Chip SMD Resistors", Digikey Description="CRGCQ 0402 220R 5%", Height=0.4mm, Ipc Land Pattern Name=RESC10050X35, Lead Free=Yes, Manufacturer Part Number=CRGCQ0402J220R, Octopart=https://octopart.com/crgcq0402j220r-te+connectivity-91018007, RoHS=TRUE, Series=CRGCQ
R11: library part CMP-1659-00055-2, "RES SMD 47K OHM 1% 1/10W 0603", Case Code (Imperial)=0603, Case Code (Metric)=1608, Max Operating Temperature=155°C, Max Power Dissipation=100mW, Min Operating Temperature=-55°C, Package Quantity=1, Resistance=47kR, Resistance Tolerance=1%, Resistor Type="Thick Film", Temperature Coefficient=100ppm/°C, Voltage Rating=50V, Case/Package=0603, Construction=Rectangular, Depth=0.8mm, Features="Moisture Resistant", Height=0.022inch, Lead Free="Lead Free", Length=0.063inch, Military Standard=Not, Number of Pins=2, Number of Terminations=2, Packaging="Tape and Reel", Power Rating=100mW, RoHS Compliant=Yes, Series=RC, Size Code=0603, Technology="THICK FILM", Termination=SMD/SMT, Tolerance=1%, Voltage Rating (DC)=50V, Width=0.031inch
U1: library part CMP-0243-00165-1, "ARM Cortex-M4 32-bit MCU+FPU, 512 KB Flash, 128 KB RAM, 36 I/Os, 48-Pin UFQFPN, -40 to 85 degC, Tray", I/Os (High Current)=36, Operating Frequency(F) (Processor speed) (MHz)=100, Package Description=UFQFPN48, Package Reference="48-Pin Ultra Thin Fine Pitch Quad Flat No-Lead, 7 x 7 x 0.6 mm Body, 0.5 mm Pitch, Exposed Pad", Supply Voltage(Vcc) min (V)=1.7, ComponentLink1Description="Manufacturer URL", ComponentLink1URL=http://www.st.com/, ComponentLink2Description=Datasheet, ComponentLink2URL=http://www.st.com/st-web-ui/static/active/en/resource/technical/document/datasheet/DM00115249.pdf, Core="ARM Cortex-M4", DatasheetVersion="Rev. 6", FLASH Size (Prog) (kB)=512, Internal RAM Size (kB)=128, Mounting Technology="Surface Mount", Packing=Tray
U2: library part CMP-1753-00002-2, "3-Axis Gyroscope, Accelerometer and a Digital Motion Processor(TM) (DMP), 2.375 to 3.46 V, -40 to 85 degC, 24-Pin QFN, RoHS, Tape and Reel", Manufacturer=InvenSense, Standard Package=5,000, Category=Sensors,Transducers, Datasheet URL=http://datasheet.octopart.com/MPU-6050-InvenSense-datasheet-14421344.pdf, Datasheet Version="Rev. 3.3, 05/2012", Dynamic Catalog=MPU-6000™Series, Family=Multifunction, Featured Product=MPU-60506-Axis,IntegratedI²CSolution, Manufacturer URL=http://www.invensense.com/, Online Catalog=MPU-6000™Series, Other Names="1428-1007-2 / MPU6050", Output Type=Digital, Sensor Type=MotionTracking, Unit PriceUSD=Digital
U3: "1.5MHZ, 1A STEP-DOWN DC - DC BUCK CONVERTER", ComponentLink1Description=Datasheet, ComponentLink1URL=https://www.diodes.com/assets/Datasheets/AP3401.pdf
Y1: library part CMP-06054-000017-1, "CRYSTAL 24.0000MHZ 6PF SMD", Case/Package=SMD/SMT, ESR (Equivalent Series Resistance)=150R, Frequency=24MHz, Frequency Stability=40ppm, Frequency Tolerance=30ppm, Load Capacitance=6pF, Max Operating Temperature=85°C, Min Operating Temperature=-30°C, Operating Frequency="24 MHz", Package Quantity=1, Depth=1.6mm, Height=0.028inch, Lead Free="Lead Free", Length=2mm, Mount="Surface Mount", Number of Pins=4, Packaging="Tape and Reel", REACH SVHC="No SVHC", RoHS Compliant=Yes, Series=XRCGB, Series Resistance=150R, Termination=SMD/SMT, Tolerance=30ppm, Width=1.6mm

## Via types
v1: diameter 0.6, hole 0.25, Top Layer to Bottom Layer, 29 vias
v2: diameter 0.5, hole 0.2, Top Layer to Bottom Layer, 29 vias

## Nets (pads, with @x,y where several pads share a name; then routed paths per layer and width w, separated by ;. In a path a pad name is that pad's centre, name@x,y a point inside that pad or via, vN(x,y) a via of type N, cw(c..) or ccw(c..) an arc to the next point about the centre after c; other vN are vias at no path point)
3.3V: C1.1 C2.1 C3.1 C4.1 C5.1 C10.1 C12.1 C14.1 C16.1 C17.1 D3.2 J2.1 J3.1 L1.2 R1.2 R5.2 R7.2 R8.2 U1.1 U1.9 U1.24 U1.36 U1.48 U2.8 U2.13 | length 20
  Top Layer w0.2: R8.2 4.255,17.977 4.255,19.105 v1(4.25,19.11) 4.25,19.79 4.558,20.098 R7.2 ; U2.8 11.603,19.3 11.96,19.3 12.019,19.241 12.116,19.241 12.262,19.095 12.262,18.238 12.559,17.941 C14.1 ; 14.471,9.791 U1.9 ; U1.1@15.1,13.781 U1.1 ; U1.36 22.529,13.791 22.53,13.79
  Top Layer w0.254: U2.13 10.836,22.092 10.836,23.714 10.85,23.7 v1(12.02,23.7) ; C2.1 13.981,9.021 14.16,9.2 14.16,9.48 14.471,9.791 ; U1.24 21.262,7.639 21.262,7.359 21.411,7.21 21.91,7.21 22.149,6.971 C1.1 ; 22.53,13.79 22.89,14.15 22.89,14.443 23.039,14.592 C4.1 ; v1@26,14.78 v1(26.01,14.79) ; J2.1 28.766,20.67 29.13,20.67 30.155,21.695 R1.2
  other v1: 25.92,3.51 13.4,7.9 26.51,10.59 13.77,16.63 34.6,23.73
5V: C15.1 C19.1 FB1.2 R4.2 R10.2 U3.VIN
  other v1: 39.24,7.17
fb_ldo: C16.2 R5.1 R6.2 U3.FB | length 9.9
  Top Layer w0.2: R5.1 30.45,6.9 31.792,8.242 31.792,8.742 31.899,8.849 R6.2 34.076,8.823 U3.FB
GND: C1.2 C2.2 C3.2 C4.2 C5.2 C6.1 C7.1 C8.2 C9.2 C10.2 C11.2 C12.2 C13.2 C14.2 C15.2 C17.2 C18.2 C19.2 C20.2 D2.2 J1.5 J2.5 J3.6 R2.1 R6.1 R9.1 R11.2 R12.1 U1.8 U1.23 U1.35 U1.47 U1.49 U2.1 U2.9 U2.11 U2.18 U2.25 U3.GND Y1.2 Y1.4 | length 36
  Top Layer w0.2: U2.9 11.591,19.82 12.02,19.82 12.099,19.741 12.116,19.741 12.612,19.245 12.612,19.235 12.99,18.856 13.012,18.856 C14.2@13.146,18.722 ; U2.11 11.591,20.82 12.24,20.82 12.5,20.56 13.104,20.56 C11.2 C11.2@13.18,20.572 ; 14.54,10.3 15.101,10.3 U1.8 ; U1.47@16.25,14.61 16.25,15.032 ; U1.35 21.911,13.29 22.44,13.29
  Top Layer w0.254: v1(6.64,11.23) 6.648,11.238 7.969,11.238 Y1.2 7.977,10.62 C7.1 ; Y1.4 Y1.4@9.06,12.68 ; C6.1 C6.1@9.061,13.873 ; v1(11.51,8.62) 12.669,9.779 C2.2 13.399,9.76 13.87,9.76 14.41,10.3 14.54,10.3 ; C3.2 15.73,15.97 15.73,15.552 16.25,15.032 ; U1.47@16.25,14.61 16.25,13.301 v2(16.31,13.241) ; v2(16.31,12.141) v2(17.41,12.141) ; R2.1 17.77,17.384 v1(17.77,18.44) ; U1.23 20.762,7.639 20.762,7.028 21.352,6.438 21.352,6.008 C1.2@21.389,5.97 ; 22.44,13.29 23.395,13.29 23.582,13.477 C4.2 24.905,13.835 v1(25.16,13.58) ; v1(23.38,6.81) 23.4,6.83 24.464,6.83 R9.1 ; v1(24.48,23.16) 24.516,23.196 25.58,23.196 C9.2 ; J2.5 25.106,20.766 25.631,21.291 C9.2@25.631,23.233 ; v1(29.86,5.31) 29.926,5.244 29.926,4.714 30.33,4.31 U3.GND ; R6.1 34.11,10.111 v1(34.11,11.45)
  Bottom Layer w0.254: v1@7.92,23.19 8.37,22.74 8.37,21.308 v2(9.062,20.616) v2(9.062,19.516)
  other v1: 43.06,4.06 21.16,4.57 8.82,16.29 37.78,17.14 15.28,19.83 7.89,23.2
  other v2: 16.31,8.841 17.41,8.841 18.51,8.841 19.61,8.841 20.71,8.841 16.31,9.941 17.41,9.941 18.51,9.941 19.61,9.941 20.71,9.941 16.31,11.041 17.41,11.041 18.51,11.041 19.61,11.041 20.71,11.041 18.51,12.141 19.61,12.141 20.71,12.141 17.41,13.241 18.51,13.241 19.61,13.241 20.71,13.241 10.162,19.516 10.162,20.616
imu_cpout: C13.1 U2.20 | length 2.1
  Top Layer w0.2: C13.1 6.098,21.213 6.495,20.816 U2.20
imu_int: U1.45 U2.12 | length 11.8
  Top Layer w0.2: U2.12 15.984,21.316 16.52,20.78 16.52,15.64 17.25,14.91 17.25,14.451 U1.45
imu_regout: C11.1 U2.10 | length 1.8
  Top Layer w0.2: U2.10 11.662,20.241 12.179,20.241 12.574,19.846 C11.1
imu_scl: R7.1 U1.42 U2.23 | length 25.2
  Top Layer w0.2: R7.1 6.167,18.827 6.24,18.755 v1(6.24,18.74) 6.46,18.74 6.961,19.241 7.562,19.241 U2.23 ; U1.42 18.76,14.91 19.52,15.67 19.52,21.48 v1(19,22)
  Bottom Layer w0.2: v1(6.24,18.74) 10.59,18.74 13.85,22 v1(19,22)
imu_sda: R8.1 U1.43 U2.24 | length 25.4
  Top Layer w0.2: R8.1 v1(6.493,16.947) 7.637,18.091 U2.24 ; v1(18,21) 18.97,20.03 18.97,15.74 18.26,15.03 U1.43
  Bottom Layer w0.2: v1(6.493,16.947) 7.756,18.21 10.81,18.21 14.03,21.43 17.57,21.43 v1(18,21)
LED: D3.1 R12.2 | length 2
  Top Layer w0.254: D3.1 38.06,21.84 R12.2
mcu_boot0: R2.2 U1.44 | length 1.5
  Top Layer w0.2: R2.2 17.76,15.884 U1.44
MCU_LED: D1.2 U1.26 | length 2.1
  Top Layer w0.2: D1.2@23.947,8.791 D1.2
  Top Layer w0.25: U1.26 D1.2@23.947,8.791
mcu_led_k: D1.1 R9.2 | length 2
  Top Layer w0.2: R9.2 25.28,6.85 25.483,7.053 D1.1
mcu_nrst: C9.1 J2.3 R1.1 U1.7 | length 30.3
  Top Layer w0.2: v1(11.49,9.65) 12.631,10.791 U1.7 ; J2.3 v1(26.376,20.87) v1(26.376,20.87) 26.375,23.232 C9.1 28.692,23.233 R1.1
  Bottom Layer w0.2: v1(11.49,9.65) 11.49,10.73 21.63,20.87 v1(26.376,20.87)
mcu_pa4: J3.2 U1.14 | length 12.7
  Top Layer w0.254: J3.2 7.46,3.04 7.46,5.85 8.21,6.6 15.684,6.6 16.262,7.178 16.262,7.639 U1.14
mcu_pa5: J3.3 U1.15 | length 11.1
  Top Layer w0.254: J3.3 9.5,5.43 10.17,6.1 16.07,6.1 16.76,6.79 U1.15
mcu_pa6: J3.4 U1.16 | length 9.6
  Top Layer w0.254: J3.4 11.5,5.15 11.9,5.55 16.31,5.55 17.26,6.5 U1.16
mcu_pa7: J3.5 U1.17 | length 8.1
  Top Layer w0.254: J3.5 13.5,4.66 13.91,5.07 16.83,5.07 17.76,6 U1.17
mcu_swclk: J2.4 U1.37 | length 7.8
  Top Layer w0.2: U1.37 21.26,15.18 22.24,16.16 25.38,16.16 26.376,17.156 J2.4
mcu_swdio: J2.2 U1.34 | length 10.6
  Top Layer w0.2: U1.34 26.611,12.791 27.646,13.826 J2.2
MCU_SWO: J2.6 U1.39 | length 7.4
  Top Layer w0.2: U1.39 20.27,14.451 20.27,15.05 21.94,16.72 24.52,16.72 25.1,17.3 25.1,18.274 J2.6
mcu_vcap1: C8.1 U1.22 | length 2
  Top Layer w0.254: C8.1 19.78,6.62 20.258,7.098 20.258,7.639 U1.22
NetC20_1: C20.1 R10.1 R11.1 U3.EN | length 11.5
  Top Layer w0.2: U3.EN 31.386,5.25 32.05,5.25 32.65,4.65 32.65,3.22 33.05,2.82 R10.1 39.149,2.82 R11.1 39.242,3.612 39.459,3.829 C20.1
NetL1_1: L1.1 U3.LX | length 2.5
  Top Layer w0.2: L1.1 29.142,3.36 U3.LX
NetR4_1: R4.1 U3.PG | length 3.8
  Top Layer w0.2: U3.PG 34.96,4.31 36.049,5.399 R4.1
PH0_OS_IN: C6.2 U1.5 Y1.1 | length 9.3
  Top Layer w0.2: C6.2 8.647,13.827 8.608,13.788 8.608,13.78 7.983,13.155 7.983,12.603 Y1.1 8.06,12.514 8.06,12.22 8.358,11.922 9.917,11.922 10.115,12.12 13.54,12.12 13.86,11.8 15.101,11.8 U1.5
PH0_OS_OUT: R3.2 U1.6 | length 3.2
  Top Layer w0.2: R3.2 11.873,11.291 U1.6
USB_D_N: J1.2 U1.32 | length 22.6
  Top Layer w0.28: U1.32 21.925,11.806 22.358,11.806 22.389,11.837 29.837,11.837 32.957,14.957 42.249,14.957 42.285,14.921 43.031,14.921 J1.2
USB_D_P: J1.3 U1.33 | length 22.6
  Top Layer w0.28: U1.33 21.925,12.276 22.358,12.276 22.389,12.245 29.669,12.245 32.789,15.365 42.249,15.365 42.285,15.401 43.031,15.401 J1.3
VBUS: C18.1 D2.1 FB1.1 J1.1 | length 0.4
  Top Layer w0.2: FB1.1 FB1.1@36.746,11.339 ; C18.1 C18.1@38.761,11.35 ; D2.1@40.6,12.295 D2.1
xtal_in: C7.2 R3.1 Y1.3 | length 2.7
  Top Layer w0.2: C7.2 8.983,11.241 Y1.3 10.371,11.247 R3.1
pads on no net: J1.4 J1.6 J1.7 J1.8 J1.9 J1.10 J1.11 J2. U1.2 U1.3 U1.4 U1.10 U1.11 U1.12 U1.13 U1.18 U1.19 U1.20 U1.21 U1.25 U1.27 U1.28 U1.29 U1.30 U1.31 U1.38 U1.40 U1.41 U1.46 U2.2 U2.3 U2.4 U2.5 U2.6 U2.7 U2.14 U2.15 U2.16 U2.17 U2.19 U2.21 U2.22

## Polygon pours and split planes (outlines as drawn)
GND on Int1 (GND) "GND_L02_P002" (solid, pour order 2): 1,0 cw(c1,1) 0,1 0,26 cw(c1,26) 1,27 48,27 cw(c48,26) 49,26 49,1 cw(c48,1) 48,0
3.3V on Int2 (PWR) "3.3V_L03_P003" (solid, pour order 3): 1,0 cw(c1,1) 0,1 0,26 cw(c1,26) 1,27 48,27 cw(c48,26) 49,26 49,1 cw(c48,1) 48,0

## Other copper
Top Layer:
  region net GND: 21.03,6.24 21.05,6.24 21.62,6.24 21.67,6.19 21.67,4.13 21.46,3.92 18.83,3.92 18.65,4.1 18.65,5.16 18.74,5.25 20.49,5.25 20.95,5.71 20.95,6.18 21.01,6.24
  region net GND: 15.44,18.31 15.31,18.44 12.92,18.44 12.85,18.51 12.85,19.03 12.92,19.1 14.505,19.1 14.65,19.239 14.65,20.04 14.39,20.3 12.93,20.3 12.85,20.38 12.85,20.9 12.9,20.95 15.82,20.95 16,20.77 16,15.72 15.97,15.69 15.47,15.69 15.44,15.72 15.44,17.46
  region net GND: 9.965,24.465 10.06,24.37 10.06,22.98 9.84,22.76 8.71,22.76 8.53,22.58 8.53,21.65 8.51,21.63 8.07,21.63 7.58,22.12 5.82,22.12 5.75,22.19 5.75,24.34 5.875,24.465
  region net 3.3V: 15.16,18.33 15.327,18.163 15.327,15.303 15.88,14.75 15.88,14.04 15.79,13.95 15.63,13.95 15.54,13.86 15.54,13.72 15.44,13.62 13.85,13.62 13.589,13.359 10.481,13.359 10.35,13.49 10.35,14.3 10.45,14.4 12.186,14.4 12.378,14.208 13.738,14.208 13.99,14.46 13.99,15.16 13.53,15.619 12.921,15.619 12.773,15.767 12.773,18.195 12.908,18.33
  region net GND: 9.79,14.51 9.46,14.18 9.46,12.29 9.33,12.16 8.61,12.16 8.5,12.27 8.5,13.14 8.89,13.53 8.89,15.43 8.12,16.2 8.12,18.46 8.2,18.54 8.47,18.54 8.54,18.47 8.54,17.27 9.46,16.35 11.42,16.35 12.65,15.12 13.37,15.12 13.48,15.01 13.48,14.47 13.33,14.32 12.7,14.32 12.51,14.51 10.16,14.51
  region net VBUS: 35.85,10.94 35.75,11.04 35.75,14.31 35.9,14.46 43.78,14.46 43.85,14.39 43.85,13.97 43.79,13.91 42.33,13.91 41.91,13.49 41.91,13.34 39.51,10.94
  region net GND: 41.73,19.86 41.64,19.95 38.96,19.95 38.47,19.46 36.98,19.46 36.57,19.05 36.57,16.99 37.02,16.54 43.78,16.54 43.83,16.59 43.83,16.99 43.78,17.04 42.31,17.04 41.73,17.62
  region net GND: 44.38,10.44 43.08,11.74 43.06,11.72 40.47,11.72 39.78,11.03 39.523,10.773 38.153,10.773 37.92,10.54 37.92,9.64 38.12,9.44 39.47,9.44 40.41,10.38 40.89,10.86 42.343,10.86 42.67,10.533 42.67,9.4 43.19,8.88 43.19,5.93 42.84,5.58 40.02,5.58 39.838,5.398 39.838,4.162 40.43,3.57 40.43,2.36 40.58,2.21 46.81,2.21 47.04,2.44 47.04,9.8 46.4,10.44
  region net 3.3V: 25.97,11.39 32.37,11.39 32.56,11.2 32.56,9.635 32.235,9.31 26.48,9.31 25.81,9.98 25.81,11.23
  region net 3.3V: 23.332,14.214 23.21,14.339 23.21,15.42 23.34,15.55 26.64,15.55 26.88,15.31 26.88,14.38 26.66,14.16 25.6,14.16 25.33,14.43 24.298,14.43 24.082,14.214
  region net 3.3V: 22.755,6.345 21.945,6.345 21.86,6.26 21.86,2.7 22.33,2.23 27.9,2.23 28.32,2.65 28.32,4.87 27.94,5.25 23.1,5.25 22.84,5.51 22.84,6.26
  region net 3.3V: 14.16,9.4 14.29,9.27 14.29,7.28 14.12,7.11 12.7,7.11 12.53,7.28 12.53,9.225 12.705,9.4
  region net 3.3V: 29.59,22.35 29.93,22.01 29.93,22.006 30.935,21.995 31.81,22.87 38.69,22.87 39.06,22.5 39.06,20.84 39.66,20.24 41.08,20.24 41.65,20.81 41.65,24.18 41.19,24.64 29.99,24.64 29.59,24.24
  region net 5V: 35.791,3.421 35.42,3.05 33.55,3.05 33.47,3.13 33.47,3.67 33.55,3.75 35.567,3.75 36.65,4.833 36.65,7.53 35.66,8.52 35.66,10.49 35.943,10.773 37.036,10.773 37.34,10.469 37.34,8.47 37.86,7.95 40.69,7.95 40.96,8.22 40.96,10.34 41.06,10.44 42.46,10.44 42.56,10.34 42.56,8.5 42.89,8.17 42.89,6.67 42.65,6.43 38.5,6.43 37.91,5.84 37.91,3.539 37.792,3.421

## Silkscreen, mask and mechanical layers (free items; w line width, h text height)
Top Overlay:
  text "pa4" at 7.993,4.604 h1 r90
  text "pa5" at 9.923,4.604 h1 r90
  text "pa6" at 12.033,4.604 h1 r90
  text "pa7" at 14.063,4.604 h1 r90
  text "GND" at 17.694,1.884 h1
  text "3V3" at 3.006,1.804 h1 r90
Mechanical 1:
  lines w0.254: 0,1.27 ccw(c1.27,1.27) 1.27,0 3.27,0 47.73,0 ccw(c47.73,1.27) 49,1.27 49,25.73 ccw(c47.73,25.73) 47.73,27 1.5,27 1.27,27 ccw(c1.27,25.73) 0,25.73 0,1.27
Bottom 3D Body:
  lines w0.254: 2.5,1.897 3.897,0.5 46.315,0.5 48.093,2.278 48.093,23.995 46.315,25.773 4.405,25.773 2.5,23.868 2.5,1.897